# Altium PCB MaWei.PcbDoc
Units mm, origin at the board's own origin, x right, y up, seen from the top; angles counter-clockwise.
Board outline 70 x 50 mm, 4 copper layers (Top Layer, Internal Plane 1, Internal Plane 2, Bottom Layer); 33 components, 25 nets, 87 pads, 4 vias.
Unrouted connection lines stored in the file: 4.
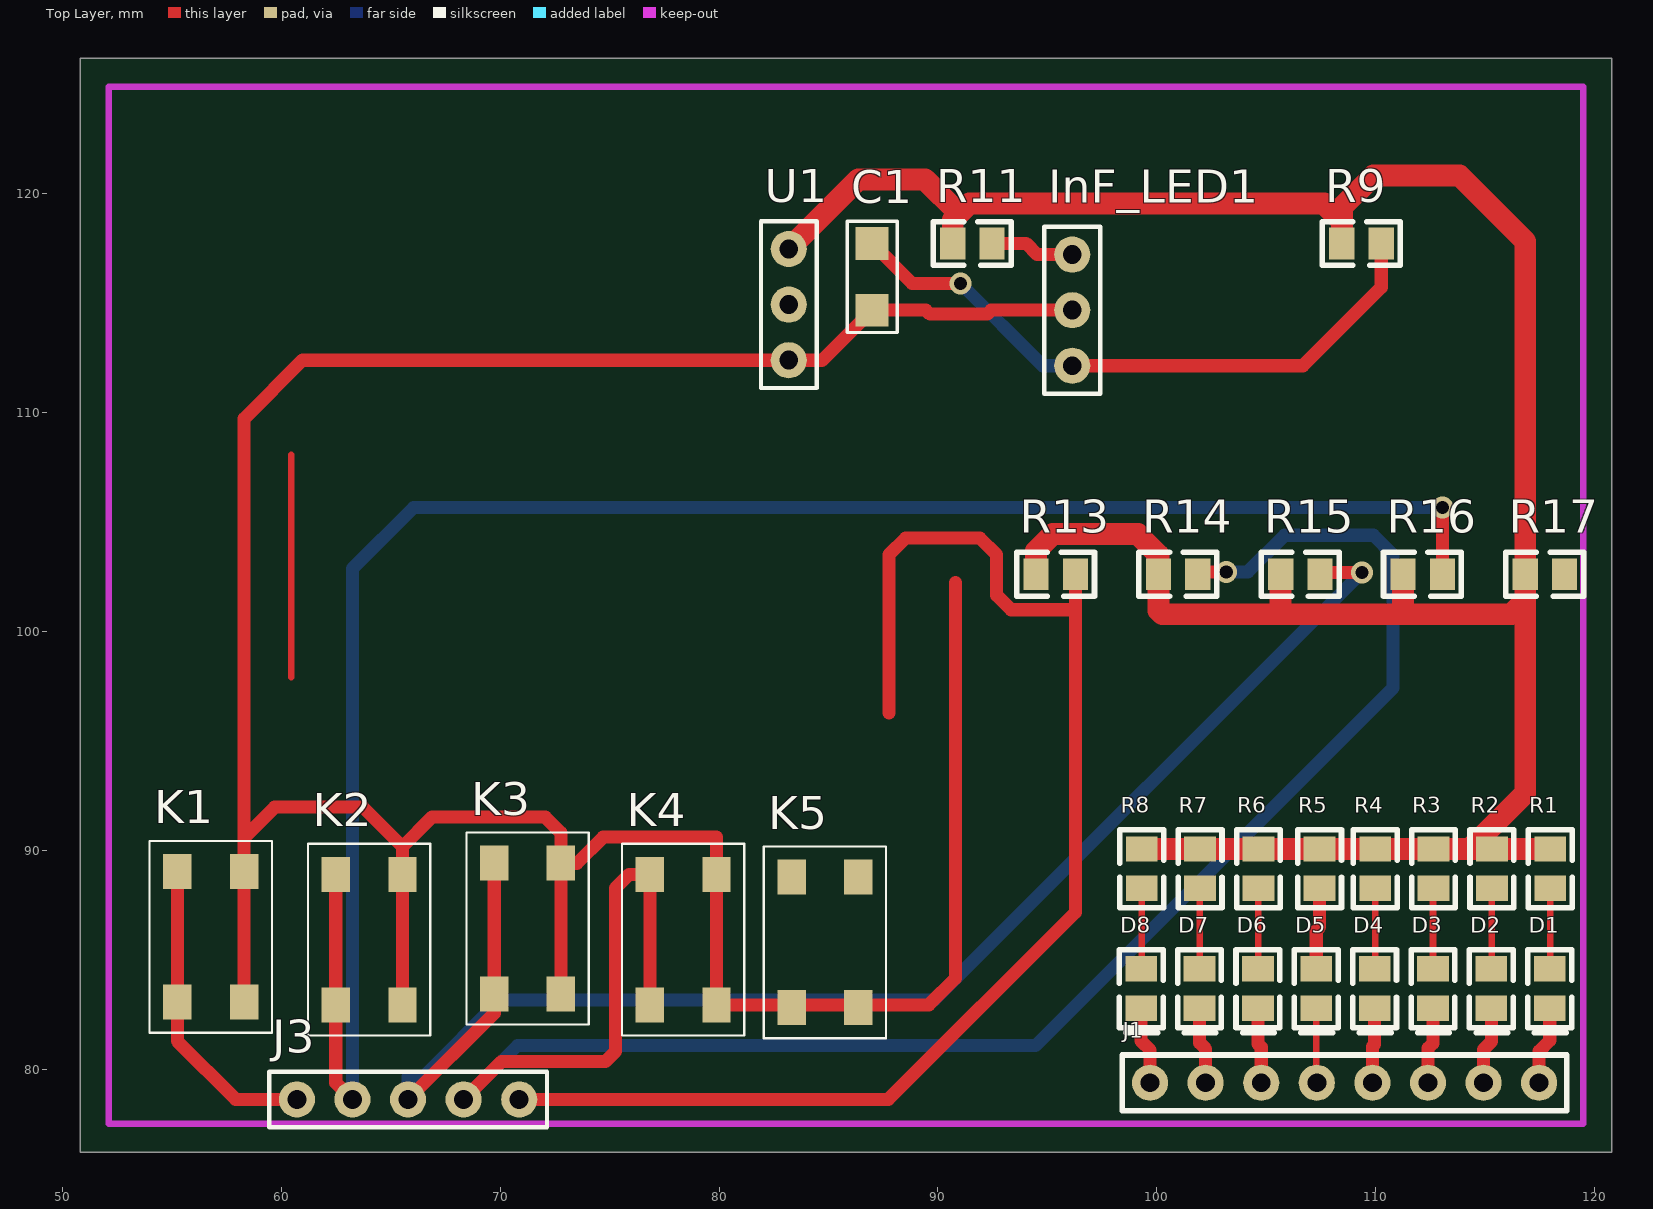
[diagram p0: Top Layer view]
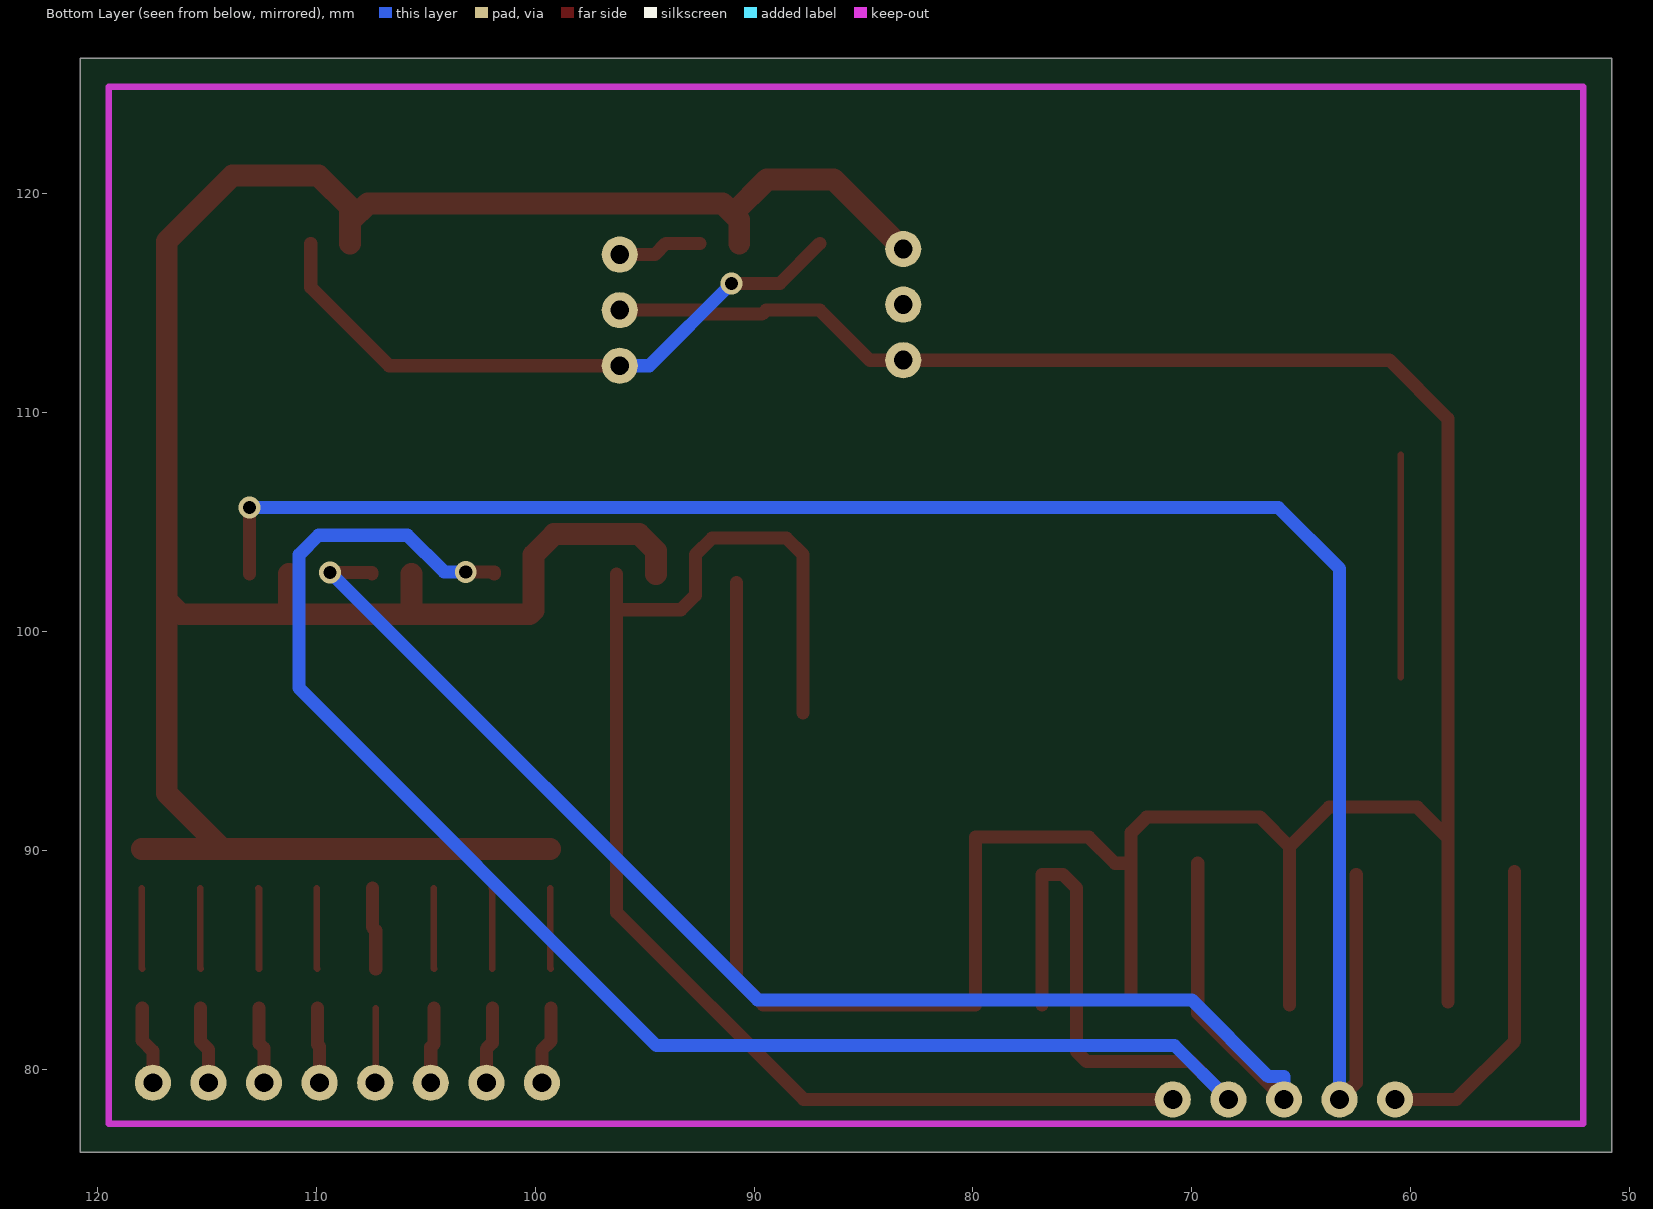
[diagram p1: Bottom Layer view, seen from below]
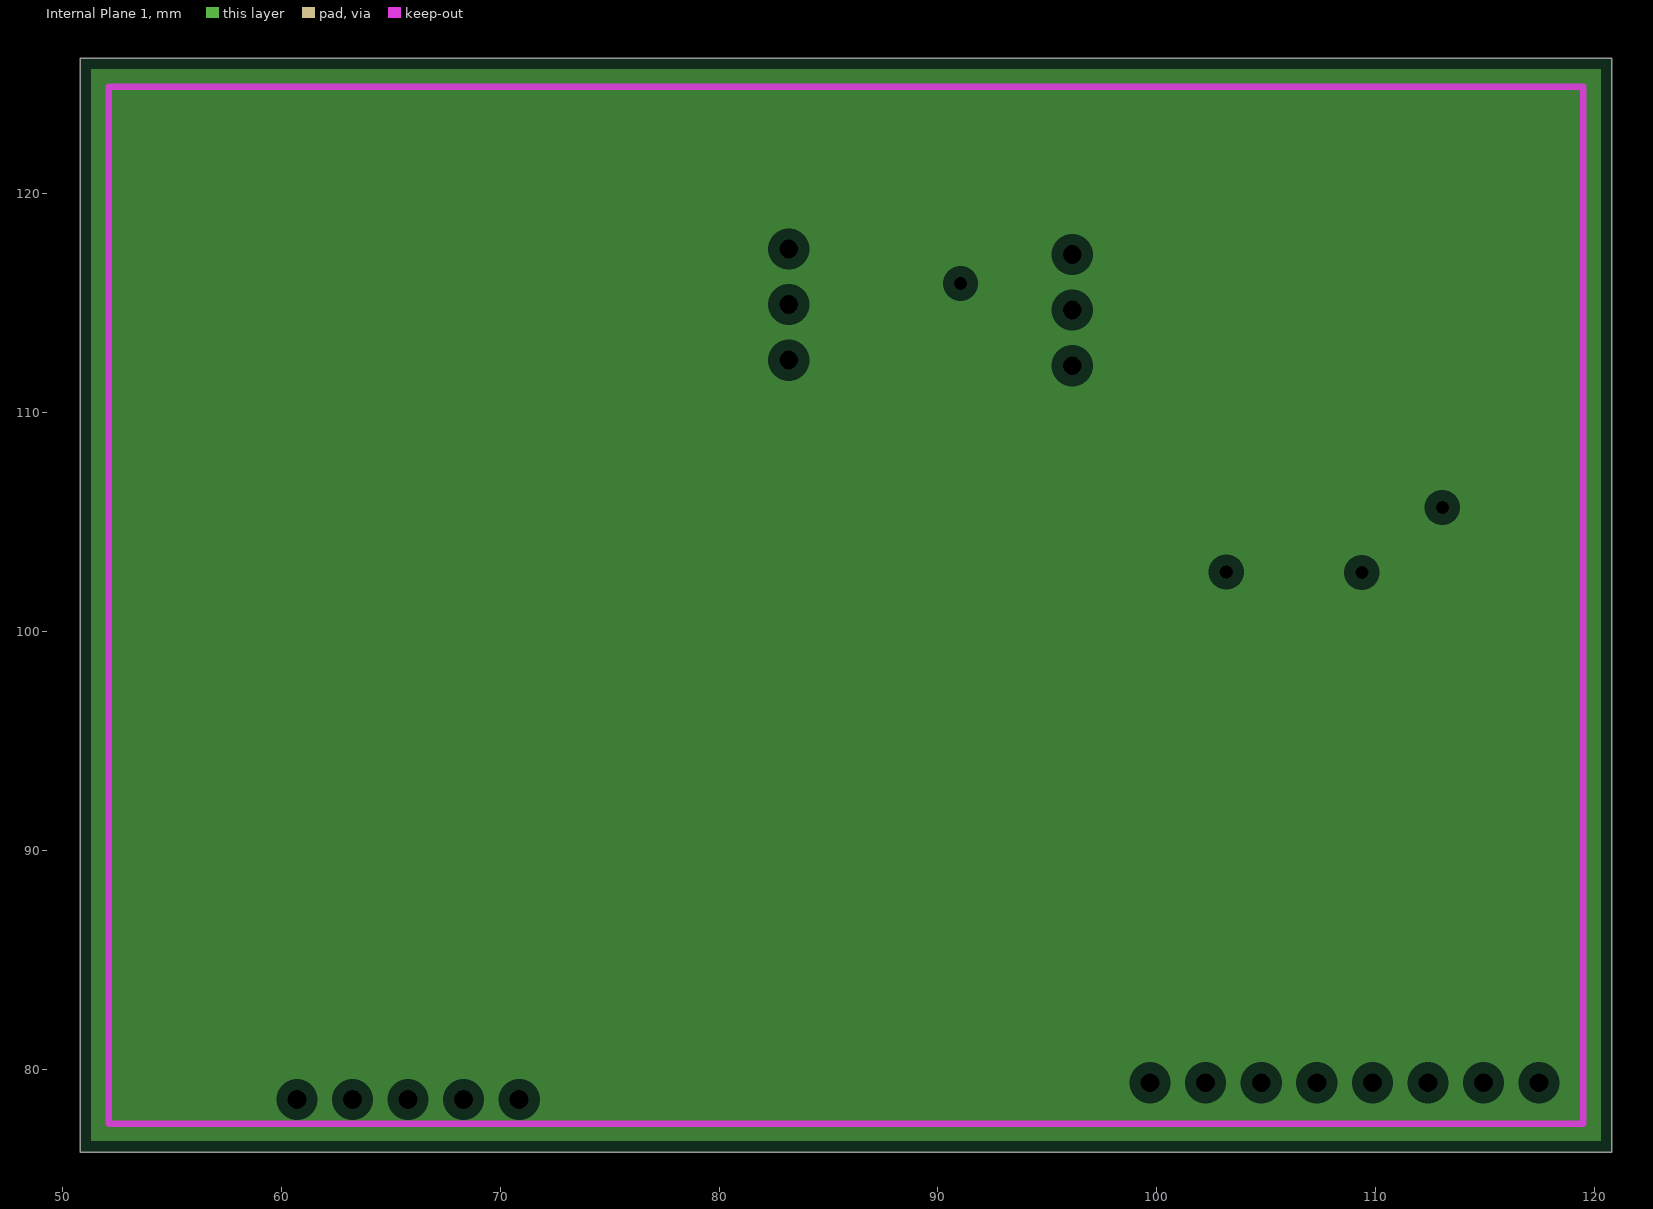
[diagram p2: Internal Plane 1, clearances drawn from the general rule]
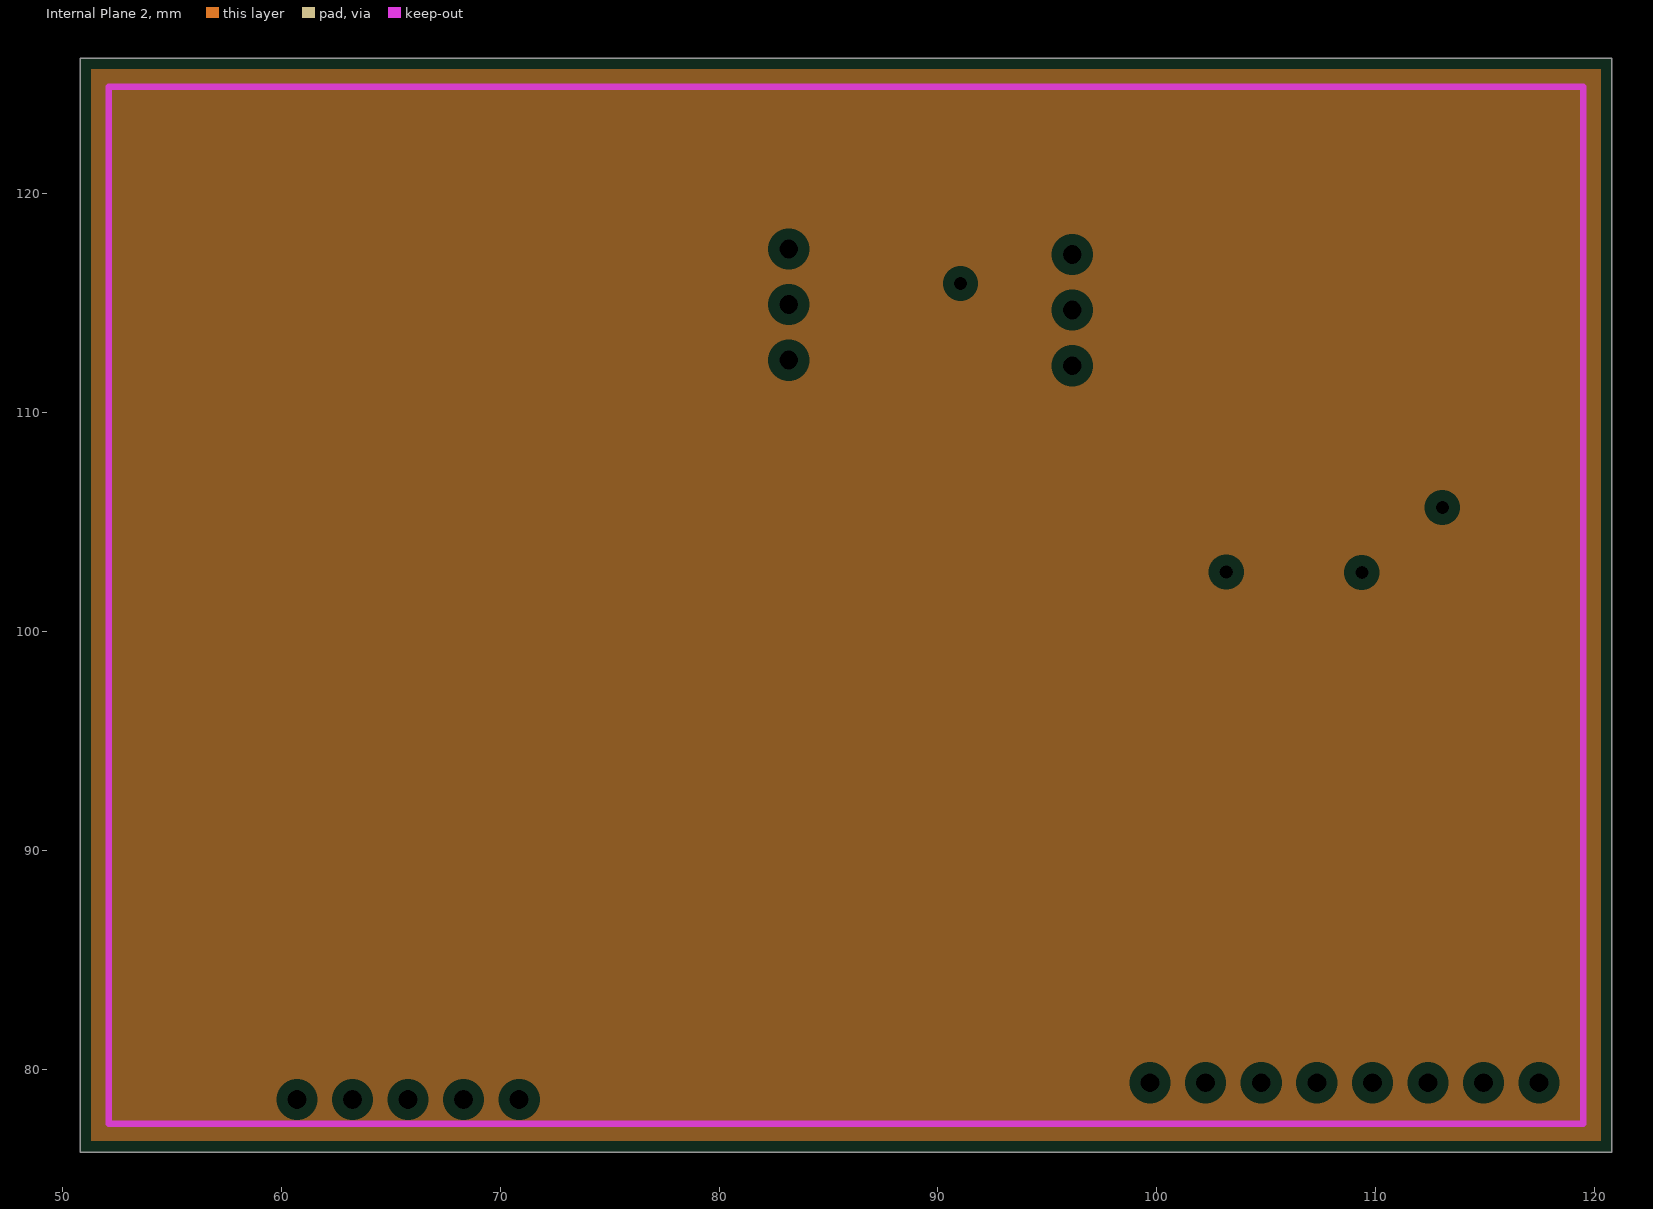
[diagram p3: Internal Plane 2, clearances drawn from the general rule]
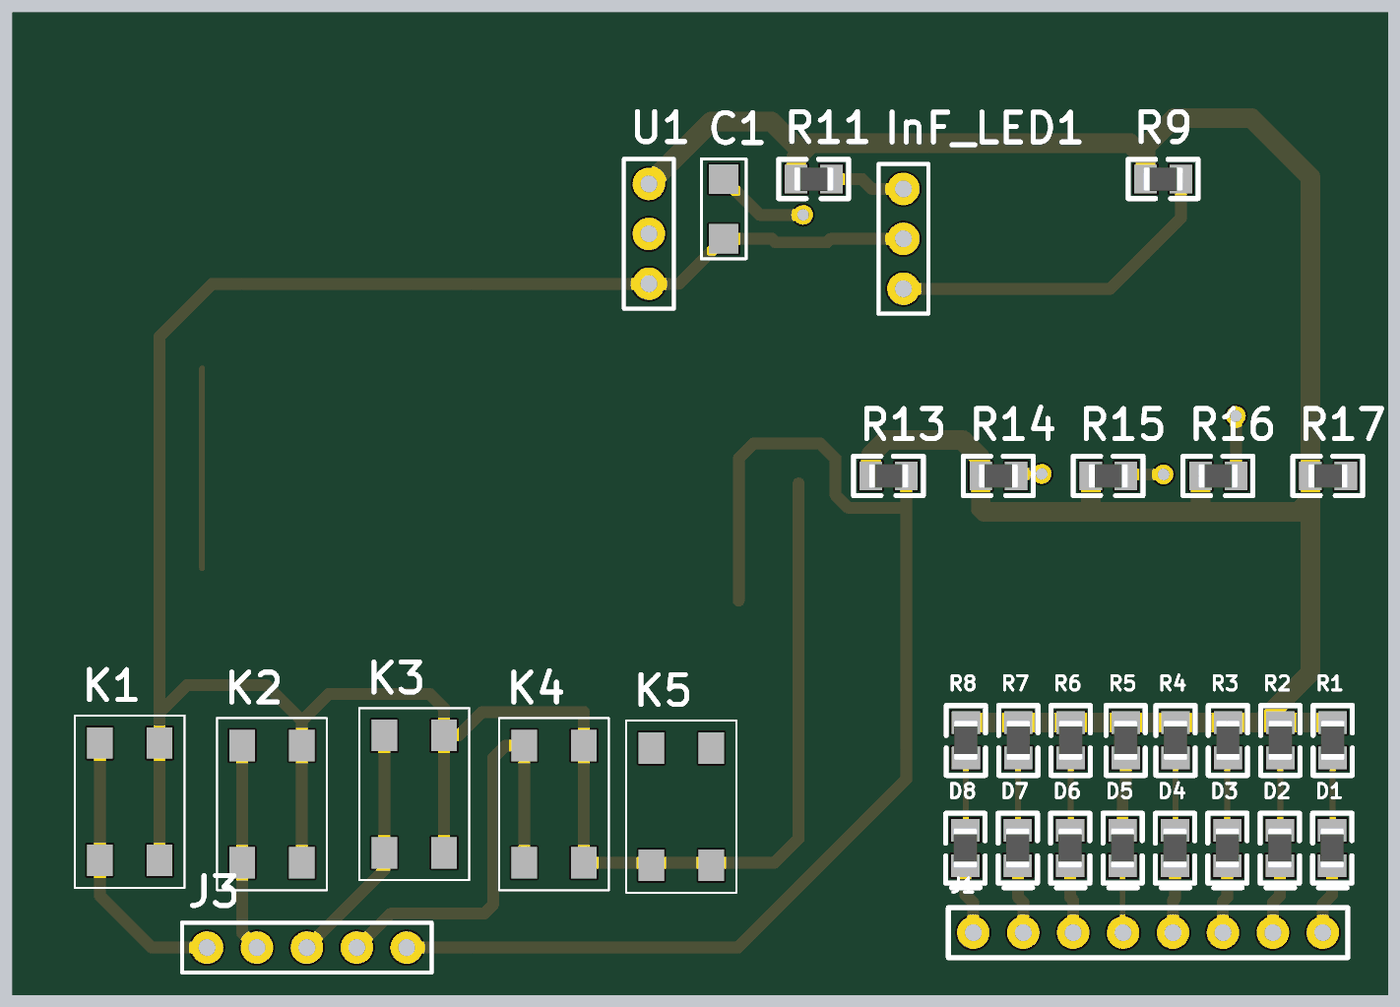
[diagram p4: 3D render of the assembled board from above, using the file's embedded part models]

## Layer stack, top to bottom
Top Solder: solder mask 0.0102, Solder Resist, Dk 3.5
Top Layer: signal copper 0.0356
Dielectric1: dielectric 0.32, FR-4, Dk 4.8
Internal Plane 1: plane copper 0.0356
Dielectric2: dielectric 0.32, FR-4, Dk 4.8
Internal Plane 2: plane copper 0.0356
Dielectric3: dielectric 0.32, FR-4, Dk 4.8
Bottom Layer: signal copper 0.0356
Bottom Solder: solder mask 0.0102, Solder Resist, Dk 3.5

## Board outline
50.8,76.2 120.8,76.2 120.8,126.2 50.8,126.2

## Design rules (kind name [scope] priority, off if disabled: settings)
Clearance [All] p1: gap=0.6
PlaneClearance [All] p1: clearance=0.508
PlaneConnect [All] p1: planeconnectstyle=Relief reliefexpansion=0.508 reliefentries=4 reliefconductorwidth=0.254 reliefairgap=0.254
PolygonConnect [All] p1: connectstyle=Relief reliefconductorwidth=0.6 reliefentries=4 polygonreliefangle="90 Angle" airgapwidth=0.254
RoutingVias [All] p1: holewidth=0.6 width=1 viastyle="Through Hole" minholewidth=0.711 minwidth=1.27 maxholewidth=0.711 maxwidth=1.27
SilkToSolderMaskClearance SilkscreenOverComponentPads [IsPad] p1: minsilkscreentomaskgap=0.254 clearancetoexposedcopper=TRUE
SolderMaskExpansion [All] p1: expansion=0.102
Width Width_1 [InNet('+5V')] p1: maxlimit=1 minlimit=1 preferedwidth=1
Width [All] p2: maxlimit=1 minlimit=0.3 preferedwidth=0.6
27 further rules are at their usual default settings.

## Components (designator, comment, footprint, x,y, rotation, side; value= is the part's Value field where it differs from the comment)
C1 "10uF" RES 86.995,114.681 r90 top
D1 "LED" LED0805 117.983,84.582 r90 top
D2 "LED" LED0805 115.316,84.582 r90 top
D3 "LED" LED0805 112.649,84.582 r90 top
D4 "LED" LED0805 109.982,84.582 r90 top
D5 "LED" LED0805 107.315,84.582 r90 top
D6 "LED" LED0805 104.648,84.582 r90 top
D7 "LED" LED0805 101.981,84.582 r90 top
D8 "LED" LED0805 99.314,84.582 r90 top
InF_LED1 "Infrared_LED" 3PIN 96.139,112.141 r90 top
J1 "8PIN" 8PIN 117.475,79.375 r270 top
J3 "5PIN" 5PIN 70.866,78.613 r270 top
K1 "KEY" KEY 55.245,83.058 r90 top
K2 "KEY" KEY 62.484,82.931 r90 top
K3 "KEY" KEY 69.723,83.439 r90 top
K4 "KEY" KEY 76.835,82.931 r90 top
K5 "KEY" KEY 83.312,82.804 r90 top
R1 "1K" RES0805 117.983,88.265 r90 top
R2 "1K" RES0805 115.316,88.265 r90 top
R3 "1K" RES0805 112.649,88.265 r90 top
R4 "1K" RES0805 109.982,88.265 r90 top
R5 "1K" RES0805 107.442,88.265 r90 top
R6 "1K" RES0805 104.648,88.265 r90 top
R7 "1K" RES0805 101.981,88.265 r90 top
R8 "1K" RES0805 99.314,88.265 r90 top
R9 "101" RES0805 108.458,117.729 r0 top
R11 "10K" RES0805 90.678,117.729 r0 top
R13 "4.7K" RES0805 94.488,102.616 r0 top
R14 "4.7K" RES0805 100.076,102.616 r0 top
R15 "4.7K" RES0805 105.664,102.616 r0 top
R16 "4.7K" RES0805 111.252,102.616 r0 top
R17 "4.7K" RES0805 116.84,102.616 r0 top
U1 "DS18B20" 3PIN 83.185,112.395 r90 top

## Footprints (in the part's own frame and the unit in brackets; to place one, negate y for a bottom-side part, rotate by r counter-clockwise, add the part's x,y. Pads: shape width x height; smd on the part's side, far side on the other; paste and mask are expansions set on the pad)
3PIN [mil]
  round 65 hole 34: 1(0,0) 2(100,0) 3(200,0)
  silkscreen extent -50,-50 250,50
5PIN [mil]
  round 65 hole 34: 1(0,0) 2(0,-100) 3(0,-200) 4(0,-300) 5(0,-400)
  silkscreen extent -50,-450 50,50
8PIN [mil]
  round 65 hole 34: 1(0,0) 2(0,-100) 3(0,-200) 4(0,-300) 5(0,-400) 6(0,-500) 7(0,-600) 8(0,-700)
  silkscreen extent -50,-750 50,50
KEY [mm]
  rect 1.6x1.3 smd: 1(0,0) 1(5.969,0) 2(0,-3.048) 2(5.969,-3.048)
  silkscreen extent -1.4,-4.32 7.37,1.27
LED0805 [mm] "LED0805"
  rect 1.15x1.45 smd: 1(0,0.025) 2(-1.8,0.025)
  silkscreen extent -2.93,-0.98 0.87,1.02, body extent -1.9,-0.57 0.1,0.63, height 0.5
RES [mm]
  rect 1.5x1.5 smd: 1(0,0) 2(3.048,0)
  silkscreen extent -1.02,-1.14 4.06,1.14
RES0805 [mm] "RES0805"
  rect 1.15x1.45 smd: 1(1.8,0) 2(0,0)
  silkscreen extent -0.89,-1 2.67,1, body extent -0.1,-0.6 1.9,0.6, height 0.5

## Part data
C1: library part CAP2
R1 R2 R3 R4 R5 R6 R7 R8 R9 R11 R13 R14 R15 R16 R17: library part RES

## Via types
v1: diameter 1, hole 0.6, Top Layer to Bottom Layer, 4 vias

## Nets (pads, with @x,y where several pads share a name; then routed paths per layer and width w, separated by ;. In a path a pad name is that pad's centre, name@x,y a point inside that pad or via, vN(x,y) a via of type N, cw(c..) or ccw(c..) an arc to the next point about the centre after c; other vN are vias at no path point)
+5V: R1.1 R2.1 R3.1 R4.1 R5.1 R6.1 R7.1 R8.1 R9.2 R11.2 R13.2 R14.2 R15.2 R16.2 R17.2 U1.3 | length 119.3
  Top Layer w1: U1.3 86.36,120.65 89.408,120.65 90.97,119.088 ; R11.2 90.678,118.796 90.97,119.088 ; R13.2 94.488,103.683 95.25,104.445 99.136,104.445 100.076,103.505 R14.2 100.076,100.965 100.254,100.787 105.664,100.787 ; R8.1 R7.1 R6.1 R5.1 R4.1 R3.1 114.3,90.065 ; R15.2 105.664,100.787 ; R9.2 108.458,118.745 ; R16.2 111.252,100.787 ; R1.1 R2.1 114.3,90.065 ; 90.97,119.088 91.44,119.558 107.645,119.558 108.458,118.745 ; 105.664,100.787 111.252,100.787 ; 108.458,118.745 108.458,119.38 109.906,120.828 113.843,120.828 116.84,117.831 R17.2 116.84,101.422 ; 111.252,100.787 116.205,100.787 116.84,101.422 ; 114.3,90.065 116.84,92.605 116.84,101.422
GND: C1.1 InF_LED1.2 K1.2 K2.2 K3.2 K4.2 K5.2 U1.1 | length 142.8
  Top Layer w0.6: K1.2@58.293,83.058 58.293,89.027 58.293,90.576 ; K2.2@65.532,82.931 65.532,88.9 65.532,90.17 ; K3.2@72.771,83.439 K3.2@72.771,89.408 ; 90.805,102.235 90.805,84.15 89.586,82.931 79.883,82.931 79.883,88.9 79.883,90.602 74.701,90.602 73.508,89.408 K3.2@72.771,89.408 ; InF_LED1.2 92.434,114.681 92.253,114.5 89.634,114.5 89.453,114.681 C1.1 84.709,112.395 U1.1 60.96,112.395 58.293,109.728 58.293,90.576 ; 58.293,90.576 59.69,91.973 63.729,91.973 65.532,90.17 ; 65.532,90.17 66.878,91.516 72.06,91.516 72.771,90.805 K3.2@72.771,89.408
NetC1_2: C1.2 InF_LED1.1 R9.1 | length 29.1
  Top Layer w0.6: C1.2 88.824,115.9 v1(91.034,115.9) ; InF_LED1.1 106.68,112.141 110.258,115.719 R9.1
  Bottom Layer w0.6: v1(91.034,115.9) 94.793,112.141 InF_LED1.1
NetD1_1: D1.1 R1.2 | length 3.7
  Top Layer w0.3: D1.1 117.983,84.607 R1.2
NetD1_2: D1.2 J1.1 | length 3.6
  Top Layer w0.6: J1.1 117.475,80.823 117.958,81.306 D1.2
NetD2_1: D2.1 R2.2 | length 3.7
  Top Layer w0.3: D2.1 115.316,84.607 R2.2
NetD2_2: D2.2 J1.2 | length 3.6
  Top Layer w0.6: J1.2 114.935,80.899 115.291,81.255 D2.2
NetD3_1: D3.1 R3.2 | length 3.7
  Top Layer w0.3: D3.1 112.624,88.24 R3.2
NetD3_2: D3.2 J1.3 | length 3.5
  Top Layer w0.6: J1.3 112.395,80.95 112.624,81.179 D3.2
NetD4_1: D4.1 R4.2 | length 3.7
  Top Layer w0.3: D4.1 109.982,84.607 R4.2
NetD4_2: D4.2 J1.4 | length 3.4
  Top Layer w0.6: J1.4 109.855,81.026 109.957,81.128 D4.2
NetD5_1: D5.1 R5.2 | length 3.7
  Top Layer w0.6: D5.1 107.29,86.335 107.442,86.487 R5.2
NetD5_2: D5.2 J1.5 | length 3.4
  Top Layer w0.3: D5.2 107.29,79.4 J1.5
NetD6_1: D6.1 R6.2 | length 3.7
  Top Layer w0.3: D6.1 104.648,84.607 R6.2
NetD6_2: D6.2 J1.6 | length 3.5
  Top Layer w0.6: D6.2 104.623,81.153 104.775,81.001 J1.6
NetD7_1: D7.1 R7.2 | length 3.7
  Top Layer w0.3: D7.1 101.956,88.24 R7.2
NetD7_2: D7.2 J1.7 | length 3.5
  Top Layer w0.6: D7.2 101.956,81.203 102.235,80.924 J1.7
NetD8_1: D8.1 R8.2 | length 3.7
  Top Layer w0.3: D8.1 99.314,84.607 R8.2
NetD8_2: D8.2 J1.8 | length 3.6
  Top Layer w0.6: D8.2 99.289,81.28 99.695,80.874 J1.8
NetInF_LED1_3: InF_LED1.3 R11.1 | length 3.9
  Top Layer w0.6: R11.1 94.031,117.729 94.539,117.221 InF_LED1.3
NetJ3_1: J3.1 K5.1 R13.1 | length 62.9
  Top Layer w0.6: J3.1 87.732,78.613 96.288,87.169 96.288,100.99 ; 87.757,96.266 87.757,103.505 88.519,104.267 91.923,104.267 92.685,103.505 92.685,101.651 93.345,100.99 96.288,100.99 ; R13.1 96.288,100.99
NetJ3_2: J3.2 K4.1 R14.1 | length 89.5
  Top Layer w0.6: J3.2 70.053,80.34 74.803,80.34 75.26,80.797 75.26,88.265 75.895,88.9 76.835,88.9 K4.1@76.835,82.931 ; R14.1 101.876,102.718 v1(103.175,102.718)
  Bottom Layer w0.6: J3.2 70.79,81.077 94.463,81.077 110.795,97.409 110.795,103.505 109.906,104.394 105.842,104.394 104.165,102.718 v1(103.175,102.718)
NetJ3_3: J3.3 K3.1 R15.1 | length 68.6
  Top Layer w0.6: J3.3 69.723,82.55 69.723,83.439 K3.1@69.723,89.408 ; R15.1 107.464,102.692 v1(109.372,102.692)
  Bottom Layer w0.6: J3.3 65.786,79.654 66.497,79.654 70.002,83.16 89.84,83.16 v1(109.372,102.692)
NetJ3_4: J3.4 K2.1 R16.1 | length 88.9
  Top Layer w0.6: K2.1@62.484,88.9 62.484,82.931 62.484,79.375 J3.4 ; R16.1 v1(113.052,105.664)
  Bottom Layer w0.6: J3.4 63.246,102.87 66.04,105.664 v1(113.052,105.664)
NetJ3_5: J3.5 K1.1 R17.1 | length 14.3
  Top Layer w0.6: K1.1@55.245,89.027 55.245,83.058 55.245,81.28 57.912,78.613 J3.5
pads on no net: U1.2
copper on no net: | length 10.2
  Top Layer w0.3: 60.452,97.917 60.452,108.077

## Polygon pours and split planes (outlines as drawn)
no net on Internal Plane 1 (split plane): 120.29,76.71 51.31,76.71 51.31,125.69 120.29,125.69
no net on Internal Plane 2 (split plane): 120.29,76.71 51.31,76.71 51.31,125.69 120.29,125.69

## Keep-outs
Keep-Out Layer:
  lines w0.3: 52.1,77.5 52.1,124.9 119.5,124.9 119.5,77.5 52.1,77.5

## Silkscreen, mask and mechanical layers (free items; w line width, h text height)
Drill Drawing:
  text ".LEGEND" at 58.062,94.234 h0.72
  text "Drill Drawing." at 58.062,91.694 h0.72

## Dimensions
52.1,77.5 to 52.1,124.9 on Mechanical 1
52.1,77.5 to 119.5,77.5 on Mechanical 1